# Altium PCB 32X35雷达微动一体板V0.6.PcbDoc (part 2 of 2)
Units mil, origin at the board's own origin, x right, y up, seen from the top; angles counter-clockwise.
Board outline 1258.74 x 1380 mil, 2 copper layers (Top Layer, Bottom Layer); 54 components, 40 nets, 229 pads, 39 vias.
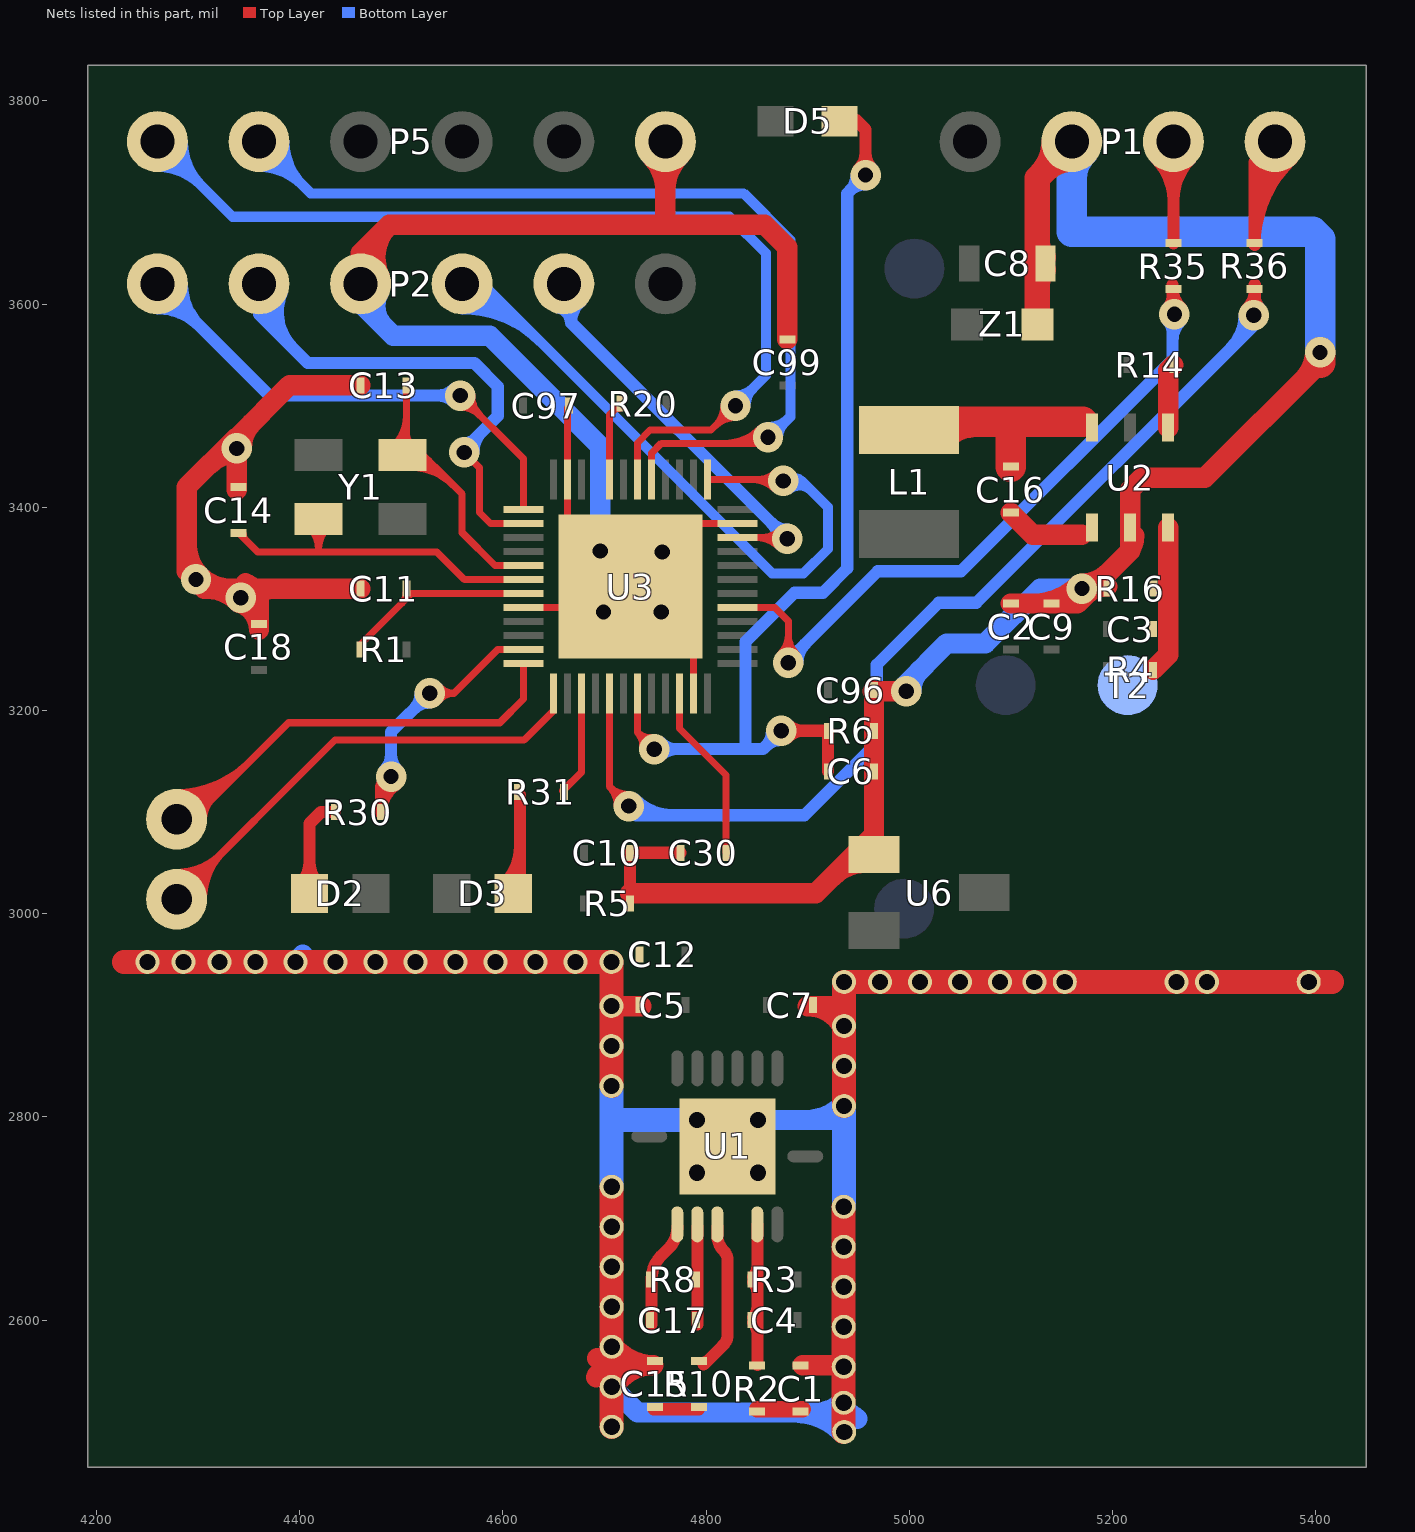
[diagram p2: the nets of this part, all layers, seen from the top]

## Via types
v1: diameter 30, hole 15, Top Layer to Bottom Layer, 36 vias
v2: diameter 26, hole 16, Top Layer to Bottom Layer, tented both sides, 2 vias
v3: diameter 40, hole 20, Top Layer to Bottom Layer, 1 vias

## Nets (pads, with @x,y where several pads share a name; then routed paths per layer and width w, separated by ;. In a path a pad name is that pad's centre, name@x,y a point inside that pad or via, vN(x,y) a via of type N, cw(c..) or ccw(c..) an arc to the next point about the centre after c; other vN are vias at no path point) (continued)
GND: C1.2 C2.2 C5.2 C6.2 C7.2 C8.2 C9.2 C10.2 C11.1 C12.2 C13.1 C14.1 C15.1 C18.2 C30.2 C96.2 C97.2 C99.2 P1.2 P2.4 P5.6 pad.1@4250.17,2952.5 pad.1@4285.61,2952.5 pad.1@4321.06,2952.5 pad.1@4356.49,2952.5 pad.1@4395.86,2952.5 pad.1@4435.23,2952.5 pad.1@4474.6,2952.5 pad.1@4513.97,2952.5 pad.1@4553.34,2952.5 pad.1@4592.71,2952.5 pad.1@4632.08,2952.5 pad.1@4671.45,2952.5 pad.1@4706.88,2830.45 pad.1@4706.88,2869.82 pad.1@4706.88,2909.19 pad.1@4706.88,2952.5 pad.1@4707.2,2495.02 pad.1@4707.2,2534.39 pad.1@4707.2,2573.76 pad.1@4707.2,2613.13 pad.1@4707.2,2652.5 pad.1@4707.2,2691.87 pad.1@4707.2,2731.24 pad.1@4791.2,2745.02 pad.1@4791.2,2797.02 pad.1@4851.17,2745.02 pad.1@4851.17,2797.02 pad.1@4935.54,2518.64 pad.1@4935.54,2554.07 pad.1@4935.54,2593.44 pad.1@4935.54,2632.81 pad.1@4935.54,2672.18 pad.1@4935.54,2711.55 pad.1@4935.86,2810.76 pad.1@4935.86,2850.13 pad.1@4935.86,2889.5 pad.1@4935.86,2932.81 pad.1@4936,2490 pad.1@4971.29,2932.8 pad.1@5010.66,2932.8 pad.1@5050.03,2932.8 pad.1@5089.4,2932.81 pad.1@5123.17,2932.81 pad.1@5153.17,2932.81 pad.1@5263.17,2932.81 pad.1@5293.17,2932.81 pad.1@5393.17,2932.81 R5.2 R6.2 R16.1 T2.1 U1.25 U2.2 U3.8 U3.23 U3.35 U3.47 U3.49 U6.1 Z1.A | length 8578.1
  Top Layer w7: U3.8@4620.2,3301.33 U3.49@4675.33,3301.33 ; U3.49@4663.52,3377.48 C97.2@4663.52,3498.24 ; U3.49@4764.01,3384.01 U3.35@4830.84,3384.01 ; U3.23@4787.54,3216.68 U3.49@4787.54,3291.46 ; 4663.52,3490.77 cw(c4670.57,3490.77) 4665.58,3495.75 ccw(c4670.57,3490.77) 4663.52,3490.77
  Top Layer w12: 4725.28,3020 C10.2@4725.28,3060 C30.2@4774.72,3060
  Top Layer w20: v1@4308.15,3320 cw(c4308.15,3277.08) v1@4338.5,3307.43 ; C14.1@4338,3417 v1@4338,3468 ; v1@4340.5,3306.21 cw(c4331.81,3279.39) 4360,3279.39 ; v1@4345.57,3307.43 cw(c4375.92,3277.08) 4375.92,3320 ; 4346.66,3325.24 cw(c4340.72,3306.89) 4360,3306.89 ; C18.2@4360,3285 4360,3320 ; C11.1@4460,3320 4306,3320 4289.05,3336.95 4289.05,3420.05 4337,3468 v1@4338,3468 ; C13.1@4460,3520 4390,3520 v1@4338,3468 ; 4710.54,2555.65 4748.17,2555.65 ; pad.1@4711.92,2908.99 C5.2@4736.51,2908.99 ; 4725.28,3020 4908,3020 4965.28,3077.28 C96.2@4965.28,3220 ; 4760,3678 P5.6@4760,3760 ; C99.2@4880,3565.28 4880,3656 4858,3678 4488,3678 ; C1.2@4895.17,2555.65 pad.1@4933.97,2555.65 ; 4933.02,2908.99 4899.82,2908.99 ; C96.2@4964,3219 v1(4997,3219) ; C2.2@5100,3305.28 5165.28,3305.28 5217.4,3357.4 5217.4,3417.4 5229,3429 5291,3429 v1@5404.33,3542.33 ; v1@4301.54,3332.54 cw(c4331.67,3362.67) 4289.05,3362.67 ccw(c4331.67,3362.67) v1@4301.54,3332.54 ; v1@4301.54,3332.54 ccw(c4331.8,3362.8) 4331.8,3320 cw(c4331.8,3362.8) v1@4301.54,3332.54 ; P2.4@4460,3620 cw(c4490.96,3633.3) 4467.13,3657.13 ccw(c4490.96,3633.3) P2.4@4460,3620 ; P2.4@4460,3620 4460,3650 4488,3678 ; 4488,3678 ccw(c4520.15,3645.85) 4478.38,3627.9 cw(c4520.15,3645.85) 4488,3678 ; 4748.16,2555.65 cw(c4748.16,2605.92) 4708.62,2574.87 ccw(c4748.16,2605.92) 4748.16,2555.65 ; 4748.16,2555.65 ccw(c4748.16,2509.55) 4708.75,2533.45 cw(c4748.16,2509.55) 4748.16,2555.65 ; 4760,3711.72 ccw(c4711.72,3711.72) 4745.86,3745.86 cw(c4711.72,3711.72) 4760,3711.72 ; 4760,3711.72 cw(c4808.28,3711.72) 4774.14,3745.86 ccw(c4808.28,3711.72) 4760,3711.72 ; 4899.82,2908.99 cw(c4899.82,2869.67) 4934.27,2888.63 ccw(c4899.82,2869.67) 4899.82,2908.99 ; 4965.28,3077.27 ccw(c4983.84,3077.27) 4970.87,3064 cw(c4983.84,3077.27) 4965.28,3077.27 ; 4965.28,3077.27 cw(c4946.72,3077.27) 4959.69,3064 ccw(c4946.72,3077.27) 4965.28,3077.27 ; 4965.28,3077.59 ccw(c4984.59,3077.59) 4970.93,3063.93 cw(c4984.59,3077.59) 4965.28,3077.59 ; 4965.28,3077.59 cw(c4945.96,3077.59) 4959.62,3063.93 ccw(c4945.96,3077.59) 4965.28,3077.59 ; 4310.69,3441.69 cw(c4338,3414.37) 4338,3453 ccw(c4338,3414.37) 4310.69,3441.69 ; v1@4343,3458 cw(c4379.21,3458) 4353.61,3483.61 ccw(c4379.21,3458) v1@4343,3458 ; 4691.64,2543.82 cw(c4712.65,2531.08) 4712.65,2555.65 ccw(c4712.65,2531.08) 4691.64,2543.82 ; 4692.89,2562.52 ccw(c4707.03,2573.63) 4707.03,2555.65 cw(c4707.03,2573.63) 4692.89,2562.52 ; 4924.13,3036.13 cw(c4958.28,3001.99) 4958.28,3050.28 ccw(c4958.28,3001.99) 4924.13,3036.13 ; 5122.38,3305.28 ccw(c5122.38,3367.62) 5166.46,3323.54 cw(c5122.38,3367.62) 5122.38,3305.28 ; v1@5170,3325 ccw(c5170,3361.21) 5195.61,3335.61 cw(c5170,3361.21) v1@5170,3325 ; v1@5173.02,3313.02 cw(c5195,3291.05) 5195,3322.13 ccw(c5195,3291.05) v1@5173.02,3313.02 ; 5213.98,3353.98 ccw(c5195.83,3372.13) 5221.5,3372.13 cw(c5195.83,3372.13) 5213.98,3353.98 ; 5388.65,3526.65 ccw(c5362.85,3552.44) 5399.33,3552.44 cw(c5362.85,3552.44) 5388.65,3526.65
  Top Layer w23.62: 4227,2952.5 pad.1@4706.88,2952.5 pad.1@4706.88,2830.45 ; pad.1@4707.2,2495.02 pad.1@4707.2,2731.24 ; pad.1@4935.54,2490 pad.1@4935.54,2711.55 ; pad.1@4935.86,2810.76 pad.1@4935.86,2932.81 5416,2932.81
  Top Layer w25: Z1.A@5126.1,3580 5126.1,3724.1 5160,3758 P1.2@5160,3760 ; 5126.1,3619.33 cw(c5146.79,3619.33) 5132.16,3633.96 ccw(c5146.79,3619.33) 5126.1,3619.33 ; 5126.1,3660.67 ccw(c5146.79,3660.67) 5132.16,3646.04 cw(c5146.79,3660.67) 5126.1,3660.67 ; 5128.71,3726.71 ccw(c5095.42,3760) 5142.5,3760 cw(c5095.42,3760) 5128.71,3726.71 ; 5133.54,3731.54 cw(c5160,3705.08) 5160,3742.5 ccw(c5160,3705.08) 5133.54,3731.54
  Top Layer w30: v1@5404.33,3542.33 v1(5404.33,3552.44)
  Bottom Layer w20: pad.1@4395.86,2952.5 pad.1@4403.17,2959.8 ; P2.4@4460,3620 4460,3601 4492,3569 4587,3569 4696,3460 v1(4696,3357) ; pad.1@4707.2,2534.39 4732.59,2508.99 4925.9,2508.99 pad.1@4935.54,2518.64 ; pad.1@4791.2,2745.02 pad.1@4791.2,2797.02 ; pad.1@4850.2,2745.02 4850.2,2797.02 4933.83,2797.02 ; v1(4997,3219) 4997,3226 5037,3266 5075,3266 5129,3320 v1(5170,3320) ; P2.4@4477.67,3610.64 ccw(c4501.83,3597.83) 4482.5,3578.5 cw(c4501.83,3597.83) P2.4@4477.67,3610.64 ; 4885.78,2508.99 cw(c4885.78,2439.78) 4934.72,2488.72 ccw(c4885.78,2439.78) 4885.78,2508.99 ; 4898.31,2797.02 ccw(c4898.31,2848.31) 4934.58,2812.04 cw(c4898.31,2848.31) 4898.31,2797.02 ; 4907.88,2508.99 ccw(c4907.88,2546.3) 4934.26,2519.92 cw(c4907.88,2546.3) 4907.88,2508.99 ; pad.1@4934.06,2508.99 cw(c4934.06,2488.06) 4948.86,2502.86 ccw(c4934.06,2488.06) pad.1@4934.06,2508.99 ; v1@5002,3219 cw(c5030.97,3219) 5010.49,3239.49 ccw(c5030.97,3219) v1@5002,3219
  Bottom Layer w23.62: pad.1@4706.88,2731.55 pad.1@4706.88,2830.45 ; 4708.85,2797.02 pad.1@4791.2,2797.02 ; pad.1@4935.86,2711.87 pad.1@4935.86,2810.76
  Bottom Layer w30: P1.2@5160,3760 5160,3671 5397,3671 5404.33,3663.67 v1(5404.33,3552.44) ; 5160,3723.79 ccw(c5123.79,3723.79) 5149.39,3749.39 cw(c5123.79,3723.79) 5160,3723.79 ; 5160,3723.79 cw(c5196.21,3723.79) 5170.61,3749.39 ccw(c5196.21,3723.79) 5160,3723.79
  other v1: 4699,3297 4756,3297 4342.04,3310.96 4298,3329 4757,3356 4338,3458
GREEN_LED: R31.1 U3.15 | length 112.3
  Top Layer w7: R31.1@4659,3121 4677.3,3139.3 U3.15@4677.3,3216.68 ; R31.1@4660,3124.37 ccw(c4660,3130.11) 4664.05,3126.05 cw(c4660,3130.11) R31.1@4660,3124.37
LIGHT: C6.1 D5.1 R6.1 U3.19 | length 1429.4
  Top Layer w7: U3.19@4732.42,3216.68 4732.42,3178.58 ; v1(4749,3162) 4732.42,3178.58 ; 4732.42,3178.58 ccw(c4745.26,3191.42) 4747.55,3173.41 cw(c4745.26,3191.42) 4732.42,3178.58 ; 4732.42,3178.58 cw(c4719.58,3165.74) 4737.59,3163.45 ccw(c4719.58,3165.74) 4732.42,3178.58
  Top Layer w12: v1(4874,3180) R6.1@4920,3180 C6.1@4920,3140 ; D5.1@4931,3781 4948,3781 4957,3772 v1(4957,3727) ; 4895.73,3180 ccw(c4895.73,3158.27) 4880.36,3173.64 cw(c4895.73,3158.27) 4895.73,3180 ; 4895.73,3180 cw(c4895.73,3201.73) 4880.36,3186.36 ccw(c4895.73,3201.73) 4895.73,3180 ; 4957,3748.73 ccw(c4978.73,3748.73) 4963.36,3733.36 cw(c4978.73,3748.73) 4957,3748.73 ; 4957,3748.73 cw(c4935.27,3748.73) 4950.64,3733.36 ccw(c4935.27,3748.73) 4957,3748.73 ; D5.1@4933.32,3782.87 cw(c4938.35,3766.67) 4950.34,3778.66 ccw(c4938.35,3766.67) D5.1@4933.32,3782.87
  Bottom Layer w12: v1(4749,3162) 4856,3162 v1(4874,3180) ; 4839,3162 4839,3268 4887,3316 4915,3316 4939,3340 4939,3709 v1(4957,3727) ; 4770.73,3162 ccw(c4770.73,3140.27) 4755.36,3155.64 cw(c4770.73,3140.27) 4770.73,3162 ; 4770.73,3162 cw(c4770.73,3183.73) 4755.36,3168.36 ccw(c4770.73,3183.73) 4770.73,3162 ; 4858.64,3164.64 ccw(c4843.27,3180) 4865,3180 cw(c4843.27,3180) 4858.64,3164.64 ; 4858.64,3164.64 cw(c4874,3149.27) 4874,3171 ccw(c4874,3149.27) 4858.64,3164.64 ; 4941.64,3711.64 ccw(c4926.27,3727) 4948,3727 cw(c4926.27,3727) 4941.64,3711.64 ; 4941.64,3711.64 cw(c4957,3696.27) 4957,3718 ccw(c4957,3696.27) 4941.64,3711.64
NetC1_1: C1.1 R2.1 | length 45
  Top Layer w16: R2.1@4850.17,2512.34 C1.1@4895.17,2512.34
NetC3_1: C3.1 R4.1 R16.2 U2.3 | length 146.1
  Top Layer w20: R4.1@5240,3240 5254.79,3254.79 U2.3@5254.79,3380
NetC4_2: C4.2 R2.2 R3.2 U1.5 | length 233.3
  Top Layer w11.8: R2.2@4850.53,2555.65 U1.5@4850.53,2694.23 ; C4.2@4846.11,2597.45 cw(c4835.45,2586.79) 4850.53,2586.79 ccw(c4835.45,2586.79) C4.2@4846.11,2597.45 ; C4.2@4846.11,2602.55 ccw(c4835.45,2613.21) 4850.53,2613.21 cw(c4835.45,2613.21) C4.2@4846.11,2602.55 ; R3.2@4846.11,2637.45 cw(c4835.45,2626.79) 4850.53,2626.79 ccw(c4835.45,2626.79) R3.2@4846.11,2637.45 ; R3.2@4846.11,2642.55 ccw(c4835.45,2653.21) 4850.53,2653.21 cw(c4835.45,2653.21) R3.2@4846.11,2642.55
NetC15_2: C15.2 R10.2 | length 45
  Top Layer w12: C15.2@4748.17,2512.34 R10.2@4793.17,2512.34
NetC16_1: C16.1 L1.1 U2.6 | length 264.3
  Top Layer w30: L1.1@5024,3484 5171,3484 ; C16.1@5100,3440 5100,3482 ; L1.1@5031.69,3469.97 cw(c5065.57,3436.09) 5065.57,3484 ccw(c5065.57,3436.09) L1.1@5031.69,3469.97
NetC16_2: C16.2 U2.1 | length 79
  Top Layer w20: C16.2@5100,3394.72 5121.72,3373 5170,3373
NetC17_1: C17.1 R8.1 U1.2 | length 96.6
  Top Layer w11.8: C17.1@4791.47,2595.65 U1.2@4791.47,2692.26
NetC17_2: C17.2 R8.2 U1.1 | length 104.4
  Top Layer w11.8: C17.2@4746.51,2595.65 4746.51,2640.65 cw(c4778.73,2640.65) 4755.95,2663.43 4763.17,2670.65 ccw(c4742.35,2691.46) 4771.79,2691.46 U1.1@4771.79,2692.26
NetC30_1: C30.1 U3.22 | length 175.8
  Top Layer w7: U3.22@4773.76,3216.68 4773.76,3182.24 4819.53,3136.47 4819.53,3060.47 C30.1@4820,3060
NetD2_K: D2.K R30.2 | length 191.8
  Top Layer w12: D2.K@4409.69,3020 4409.69,3088.69 4421,3100 R30.2@4434.72,3100 ; 4409.69,3050.7 ccw(c4439.4,3050.7) 4418.39,3029.69 cw(c4439.4,3050.7) 4409.69,3050.7 ; 4409.69,3050.7 cw(c4379.97,3050.7) 4400.98,3029.69 ccw(c4379.97,3050.7) 4409.69,3050.7
NetD3_K: D3.K R31.2 | length 182.3
  Top Layer w12: D3.K@4610.31,3020 4617,3026.69 R31.2@4617,3117 ; D3.K@4601.61,3029.69 ccw(c4564.46,3066.84) 4617,3066.84 cw(c4564.46,3066.84) D3.K@4601.61,3029.69
NetR10_1: R10.1 U1.3 | length 157.8
  Top Layer w11.8: R10.1@4797.67,2556.15 4816.92,2575.4 ccw(c4806.68,2585.65) 4821.17,2585.65 4821.17,2658.99 ccw(c4807.51,2658.99) 4817.17,2668.65 cw(c4831.67,2683.15) 4811.16,2683.15 U1.3@4811.16,2692.26 ; R10.1@4796.94,2558.04 ccw(c4796.94,2564.36) 4801.41,2559.89 cw(c4796.94,2564.36) R10.1@4796.94,2558.04
NetR14_1: R14.1 U2.4 | length 63.7
  Top Layer w20: U2.4@5254.79,3478.43 5254.79,3534.79 R14.1@5260,3540
NetR20_2: R20.2 U3.44 | length 95.8
  Top Layer w7: U3.44@4704.86,3427.32 4704.86,3491.13 R20.2@4715.72,3502 ; 4708.26,3494.53 cw(c4715.72,3487.07) 4715.72,3497.63 ccw(c4715.72,3487.07) 4708.26,3494.53
NetR35_2: R35.2 U3.29 | length 960.7
  Top Layer w7: U3.29@4830.84,3301.33 4867.67,3301.33 4881,3288 v1@4881,3249 ; 4881,3274.76 ccw(c4908.76,3274.76) 4889.13,3255.13 cw(c4908.76,3274.76) 4881,3274.76 ; 4881,3274.76 cw(c4853.24,3274.76) 4872.87,3255.13 ccw(c4853.24,3274.76) 4881,3274.76
  Top Layer w12: v1@5259,3592 5259,3619 ; v1@5254.64,3596.36 ccw(c5244.1,3606.9) 5259,3606.9 cw(c5244.1,3606.9) v1@5254.64,3596.36 ; R35.2@5259,3616.56 ccw(c5287.56,3616.56) 5267.36,3596.36 cw(c5287.56,3616.56) R35.2@5259,3616.56
  Bottom Layer w12: v1@4880,3248 4969,3337 5051,3337 5259,3545 v1@5259,3590 ; v1@4881,3256 ccw(c4881,3272.9) 4892.95,3260.95 cw(c4881,3272.9) v1@4881,3256 ; v1@4890,3247 cw(c4916.56,3247) 4897.78,3265.78 ccw(c4916.56,3247) v1@4890,3247 ; v1@5254.64,3583.64 cw(c5244.1,3573.1) 5259,3573.1 ccw(c5244.1,3573.1) v1@5254.64,3583.64 ; 5259,3563.44 cw(c5287.56,3563.44) 5267.36,3583.64 ccw(c5287.56,3563.44) 5259,3563.44
  other v1: 4881,3247 5261,3590
NetR36_1: R36.1 U3.17 | length 1365.8
  Top Layer w7: U3.17@4704.86,3216.68 4704.86,3125.14 ; v1(4724,3106) 4704.86,3125.14 ; 4704.86,3125.14 ccw(c4723.32,3143.6) 4723.79,3117.5 cw(c4723.32,3143.6) 4704.86,3125.14 ; 4704.86,3125.14 cw(c4686.4,3106.68) 4712.5,3106.21 ccw(c4686.4,3106.68) 4704.86,3125.14
  Top Layer w12: v1@5340,3590 5340,3619 ; v1@5332.64,3595.36 ccw(c5314.86,3613.14) 5340,3613.14 cw(c5314.86,3613.14) v1@5332.64,3595.36 ; 5340,3608.31 ccw(c5358.31,3608.31) 5345.36,3595.36 cw(c5358.31,3608.31) 5340,3608.31
  Bottom Layer w12: v1(4724,3106) 4724,3104 4731,3097 4897,3097 4968,3168 4968,3245 5029,3306 5066,3306 5339,3579 v1(5339,3589) ; v1@4721.88,3103.88 ccw(c4738.49,3120.49) 4738.49,3097 cw(c4738.49,3120.49) v1@4721.88,3103.88 ; v1@4730.36,3112.36 ccw(c4767.46,3149.46) 4767.46,3097 cw(c4767.46,3149.46) v1@4730.36,3112.36 ; 5316.56,3556.56 ccw(c5284.13,3589) 5330,3589 cw(c5284.13,3589) 5316.56,3556.56
NRST: C11.2 R1.1 U3.7 | length 209.7
  Top Layer w7: R1.1@4460,3260 4460,3264.94 4510.17,3315.11 U3.7@4620.2,3315.11 ; 4500.4,3305.34 ccw(c4489.68,3316.06) 4504.84,3316.06 cw(c4489.68,3316.06) 4500.4,3305.34
OUT: P1.3 R35.1 | length 282
  Top Layer w12: R35.1@5260,3660 P1.3@5260,3760 ; 5260,3702.06 ccw(c5202.06,3702.06) 5243.03,3743.03 cw(c5202.06,3702.06) 5260,3702.06 ; 5260,3702.06 cw(c5317.94,3702.06) 5276.97,3743.03 ccw(c5317.94,3702.06) 5260,3702.06
OUT1: P1.4 R36.2 | length 546.5
  Top Layer w12: R36.2@5340,3660.28 5340,3740 P1.4@5360,3760 ; P1.4@5360,3760 ccw(c5403.43,3713.77) 5340,3713.77 cw(c5403.43,3713.77) P1.4@5360,3760 ; R36.2@5340,3658.3 cw(c5455.54,3658.3) 5376.43,3742.51 ccw(c5455.54,3658.3) R36.2@5340,3658.3 ; 5340,3686.03 cw(c5429.49,3686.03) 5368.22,3751.25 ccw(c5429.49,3686.03) 5340,3686.03
PWM_O: P5.2 U3.41 | length 1409.5
  Top Layer w7: U3.41@4746.2,3427.32 4746.2,3453.2 4756,3463 v1@4854,3463 ; 4818.75,3463 ccw(c4818.75,3511.25) 4852.87,3477.13 cw(c4818.75,3511.25) 4818.75,3463 ; 4835.65,3463 ccw(c4835.65,3494.35) 4857.82,3472.18 cw(c4835.65,3494.35) 4835.65,3463
  Bottom Layer w10: P5.2@4360,3760 4411,3709 4837,3709 4883,3663 4883,3489 4863,3469 v1(4861,3469) ; 4385.61,3734.39 ccw(c4360,3708.79) 4360,3745 cw(c4360,3708.79) 4385.61,3734.39 ; 4385.61,3734.39 cw(c4411.21,3760) 4375,3760 ccw(c4411.21,3760) 4385.61,3734.39 ; 4402.68,3717.32 ccw(c4360,3674.64) 4360,3735 cw(c4360,3674.64) 4402.68,3717.32 ; 4402.68,3717.32 cw(c4445.36,3760) 4385,3760 ccw(c4445.36,3760) 4402.68,3717.32 ; v1@4861,3479 ccw(c4861,3507.97) 4881.49,3487.49 cw(c4861,3507.97) v1@4861,3479 ; v1@4871,3469 cw(c4890.31,3469) 4876.66,3482.66 ccw(c4890.31,3469) v1@4871,3469
PWM_O_1: P5.1 U3.42 | length 1421.3
  Top Layer w7: U3.42@4732.42,3427.32 4732.42,3463.42 4745,3476 4805,3476 v1(4829,3500) ; 4809.37,3480.37 ccw(c4789.74,3500) 4817.5,3500 cw(c4789.74,3500) 4809.37,3480.37 ; 4809.37,3480.37 cw(c4829,3460.74) 4829,3488.5 ccw(c4829,3460.74) 4809.37,3480.37
  Bottom Layer w10: P5.1@4260,3760 4334,3686 4823,3686 4859,3650 4859,3530 v1(4829,3500) ; 4285.61,3734.39 ccw(c4260,3708.79) 4260,3745 cw(c4260,3708.79) 4285.61,3734.39 ; 4285.61,3734.39 cw(c4311.21,3760) 4275,3760 ccw(c4311.21,3760) 4285.61,3734.39 ; 4302.68,3717.32 ccw(c4260,3674.64) 4260,3735 cw(c4260,3674.64) 4302.68,3717.32 ; 4302.68,3717.32 cw(c4345.36,3760) 4285,3760 ccw(c4345.36,3760) 4302.68,3717.32 ; 4846.07,3517.07 ccw(c4863.14,3500) 4839,3500 cw(c4863.14,3500) 4846.07,3517.07 ; 4846.07,3517.07 cw(c4829,3534.14) 4829,3510 ccw(c4829,3534.14) 4846.07,3517.07
RED_LED: R30.1 U3.11 | length 557.7
  Top Layer w7: v1(4528,3217) 4552,3217 ; U3.11@4620.2,3259.99 4594.99,3259.99 4552,3217 ; 4552,3217 ccw(c4552,3197.71) 4536.96,3209.8 cw(c4552,3197.71) 4552,3217 ; 4552,3217 cw(c4552,3236.29) 4536.96,3224.2 ccw(c4552,3236.29) 4552,3217
  Top Layer w12: R30.1@4480,3100 4480,3125 v1(4490,3135) ; R30.1@4480,3098.6 cw(c4515.36,3098.6) 4495.15,3127.62 ccw(c4515.36,3098.6) R30.1@4480,3098.6 ; 4480,3121.59 cw(c4499.34,3121.59) 4488.28,3137.46 ccw(c4499.34,3121.59) 4480,3121.59
  Bottom Layer w12: v1(4490,3135) 4490,3179 v1(4528,3217) ; 4490,3156.73 ccw(c4511.73,3156.73) 4496.36,3141.36 cw(c4511.73,3156.73) 4490,3156.73 ; 4490,3156.73 cw(c4468.27,3156.73) 4483.64,3141.36 ccw(c4468.27,3156.73) 4490,3156.73 ; 4512.64,3201.64 ccw(c4497.27,3217) 4519,3217 cw(c4497.27,3217) 4512.64,3201.64 ; 4512.64,3201.64 cw(c4528,3186.27) 4528,3208 ccw(c4528,3186.27) 4512.64,3201.64
SWCLK: P2.3 U3.37 | length 1284.6
  Top Layer w7: U3.37@4801.31,3435.32 U3.37@4801.31,3427.32 v1@4876,3427.32 ; 4845.06,3427.32 cw(c4845.06,3395.06) 4867.87,3417.87 ccw(c4845.06,3395.06) 4845.06,3427.32 ; 4851.41,3427.32 ccw(c4851.41,3450.59) 4867.87,3434.13 cw(c4851.41,3450.59) 4851.41,3427.32
  Bottom Layer w10: P2.3@4560,3620 4580,3620 4865,3335 4896,3335 4920,3359 4920,3400 4894,3426 ; v1(4876,3426) cw(c4884.94,3414.78) 4895.08,3424.92 ccw(c4884.94,3414.78) v1(4876,3426) ; v1(4876,3426) 4894,3426 ; 4894,3426 ccw(c4894,3414.8) 4884.49,3420.72 cw(c4894,3414.8) 4894,3426 ; 4894,3426 cw(c4894,3437.2) 4884.49,3431.28 ccw(c4894,3437.2) 4894,3426 ; P2.3@4560,3595 cw(c4560,3486.36) 4636.82,3563.18 ccw(c4560,3486.36) P2.3@4560,3595 ; P2.3@4560,3605 cw(c4560,3520.5) 4619.75,3580.25 ccw(c4560,3520.5) P2.3@4560,3605 ; P2.3@4560,3615 cw(c4560,3554.64) 4602.68,3597.32 ccw(c4560,3554.64) P2.3@4560,3615 ; v1@4882.23,3418.18 cw(c4891.96,3405.96) 4903,3417 ccw(c4891.96,3405.96) v1@4882.23,3418.18
SWDIO: P2.2 U3.34 | length 629.9
  Top Layer w7: U3.34@4830.84,3370.23 v1@4871.77,3370.23 ; U3.34@4849.27,3370.23 cw(c4849.27,3338.27) 4871.87,3360.87 ccw(c4849.27,3338.27) U3.34@4849.27,3370.23 ; 4855.2,3370.23 ccw(c4855.2,3393.8) 4871.87,3377.13 cw(c4855.2,3393.8) 4855.2,3370.23
  Bottom Layer w12: P2.2@4667,3625 4667,3582 v1(4880,3369) ; 4667,3581.36 ccw(c4651.42,3581.36) 4654.8,3596.57 cw(c4651.42,3581.36) 4667,3581.36 ; 4667,3581.36 cw(c4695.41,3581.36) 4676.21,3602.31 ccw(c4695.41,3581.36) 4667,3581.36 ; 4864.64,3384.36 ccw(c4880,3399.73) 4880,3378 cw(c4880,3399.73) 4864.64,3384.36 ; 4864.64,3384.36 cw(c4849.27,3369) 4871,3369 ccw(c4849.27,3369) 4864.64,3384.36
USART2_RX: pad.1@4279,3014.26 U3.13 | length 865.6
  Top Layer w7: pad.1@4278,3014.26 4434.74,3171 4621,3171 4649.74,3199.74 U3.13@4649.74,3216.68 ; pad.1@4279,3033.76 ccw(c4279,3078.42) 4310.58,3046.84 cw(c4279,3078.42) pad.1@4279,3033.76 ; pad.1@4279,3040.76 ccw(c4279,3102.32) 4322.53,3058.79 cw(c4279,3102.32) pad.1@4279,3040.76 ; pad.1@4291.5,3014.26 cw(c4324.09,3014.26) 4301.05,3037.31 ccw(c4324.09,3014.26) pad.1@4291.5,3014.26 ; pad.1@4298.5,3014.26 cw(c4347.99,3014.26) 4313,3049.26 ccw(c4347.99,3014.26) pad.1@4298.5,3014.26 ; pad.1@4305.5,3014.26 cw(c4371.89,3014.26) 4324.95,3061.21 ccw(c4371.89,3014.26) pad.1@4305.5,3014.26
USART2_TX: pad.0 U3.12 | length 939
  Top Layer w7: pad.0@4279,3093 4294,3093 4389,3188 4597,3188 4620.2,3211.2 U3.12@4620.2,3246.21 ; pad.0@4279,3098.5 ccw(c4279,3147.99) 4314,3113 cw(c4279,3147.99) pad.0@4279,3098.5 ; pad.0@4279,3105.5 ccw(c4279,3171.89) 4325.95,3124.95 cw(c4279,3171.89) pad.0@4279,3105.5 ; pad.0@4279,3112.5 ccw(c4279,3195.79) 4337.9,3136.9 cw(c4279,3195.79) pad.0@4279,3112.5 ; pad.0@4279,3119.5 ccw(c4279,3219.69) 4349.84,3148.84 cw(c4279,3219.69) pad.0@4279,3119.5 ; pad.0@4305.5,3093 cw(c4333.26,3093) 4313.63,3112.63 ccw(c4333.26,3093) pad.0@4305.5,3093
USART_RX: P2.5 U3.2 | length 841.5
  Top Layer w7: v1(4562,3454) 4577,3439 4577,3395 4587.99,3384.01 U3.2@4620.2,3384.01
  Bottom Layer w12: 4366.11,3583.89 cw(c4388.47,3606.25) P2.5@4360,3620 ; 4367.52,3582.48 cw(c4391.93,3606.89) P2.5@4360,3620 ; P2.5@4370.81,3614.78 ccw(c4404.58,3598.46) 4378.06,3571.94 ; P2.5@4371.1,3615.44 ccw(c4409.98,3599.47) 4380.26,3569.74 ; P2.5@4381.61,3609.56 ccw(c4420.68,3590.68) 4390,3560 ; P2.5@4382.2,3610.88 ccw(c4428.04,3592.05) 4393,3557 ; v1(4562,3454) 4562,3457 4595,3490 4595,3519 4572,3542 4408,3542 4360,3590 P2.5@4360,3620 ; v1@4562,3463 ccw(c4562,3477.49) 4572.24,3467.24 cw(c4562,3477.49) v1@4562,3463 ; v1@4571,3454 cw(c4599.97,3454) 4579.49,3474.49 ccw(c4599.97,3454) v1@4571,3454
USART_TX: P2.6 U3.1 | length 819
  Top Layer w7: v1(4558,3510) 4620.2,3447.8 U3.1@4620.2,3397.79 ; 4577.63,3490.37 ccw(c4558,3470.74) 4558,3498.5 cw(c4558,3470.74) 4577.63,3490.37 ; 4577.63,3490.37 cw(c4597.26,3510) 4569.5,3510 ccw(c4597.26,3510) 4577.63,3490.37
  Bottom Layer w12: P2.6@4260,3620 4370,3510 v1(4558,3510) ; 4300.97,3579.03 ccw(c4260,3538.06) 4260,3596 cw(c4260,3538.06) 4300.97,3579.03 ; 4300.97,3579.03 cw(c4341.94,3620) 4284,3620 ccw(c4341.94,3620) 4300.97,3579.03 ; 4536.27,3510 ccw(c4536.27,3531.73) 4551.64,3516.36 cw(c4536.27,3531.73) 4536.27,3510 ; 4536.27,3510 cw(c4536.27,3488.27) 4551.64,3503.64 ccw(c4536.27,3488.27) 4536.27,3510
XTALA: C13.2 U3.5 Y1.1 | length 601.9
  Top Layer w7: C13.2@4505.28,3520 4505.28,3467.72 ; U3.5@4620.2,3342.67 4592.33,3342.67 4560,3375 4560,3413 4505.28,3467.72 ; 4505.28,3467.72 ccw(c4513.03,3467.72) 4508.5,3461.43 cw(c4513.03,3467.72) 4505.28,3467.72 ; 4505.28,3467.72 cw(c4501.3,3467.72) 4501.31,3463.74 ccw(c4501.3,3467.72) 4505.28,3467.72 ; Y1.1@4492.68,3460.16 ccw(c4462.26,3490.57) 4505.28,3490.57 cw(c4462.26,3490.57) Y1.1@4492.68,3460.16 ; Y1.1@4497.63,3455.21 ccw(c4479.16,3473.67) 4505.28,3473.67 cw(c4479.16,3473.67) Y1.1@4497.63,3455.21 ; 4505.28,3471.56 ccw(c4521.4,3471.56) 4510,3460.16 cw(c4521.4,3471.56) 4505.28,3471.56 ; Y1.1@4509.21,3439.25 cw(c4509.21,3380.01) 4551.1,3421.9 ccw(c4509.21,3380.01) Y1.1@4509.21,3439.25 ; Y1.1@4509.21,3446.25 cw(c4509.21,3403.9) 4539.15,3433.85 ccw(c4509.21,3403.9) Y1.1@4509.21,3446.25 ; Y1.1@4509.21,3453.25 cw(c4509.21,3427.8) 4527.2,3445.8 ccw(c4509.21,3427.8) Y1.1@4509.21,3453.25
XTALB: C14.2 U3.6 Y1.3 | length 439.5
  Top Layer w7: C14.2@4340,3374.72 4358.72,3356 4535,3356 4562.11,3328.89 U3.6@4620.2,3328.89 ; 4418.66,3357.66 Y1.3@4418.66,3388.5 ; 4418.66,3358.93 ccw(c4389.09,3358.93) 4410,3379.84 cw(c4389.09,3358.93) 4418.66,3358.93 ; 4418.66,3358.93 cw(c4448.23,3358.93) 4427.32,3379.84 ccw(c4448.23,3358.93) 4418.66,3358.93 ; C14.2@4344.37,3374.72 ccw(c4354.93,3374.72) 4347.47,3367.26 cw(c4354.93,3374.72) C14.2@4344.37,3374.72
pads on no net: U1.10 U1.14 U1.16 U1.21 U3.3 U3.4 U3.20 U3.21 U3.25 U3.26 U3.27 U3.28 U3.30 U3.31 U3.32 U3.33 U3.38 U3.39 U3.40 U3.43 U3.45 U3.46 Y1.2 Y1.4

## Polygon pours and split planes (outlines as drawn)
GND on Top Layer "Top Layer-No Net" (solid, remove dead copper, pour order 1000): 4195.14,3840.35 5453.88,3840.35 5453.88,2475.35 5438.88,2460.35 4195.14,2460.35 4195.14,3840.35
GND on Bottom Layer "Top Layer-No Net" (solid, remove dead copper, pour order 1001): 4196.72,3829 5455.46,3829 5455.46,2449 4196.72,2449 4196.72,3822

## Keep-outs
Keep-Out Layer:
  circle w12: c4278.69,2546 r43.31
  circle w12: c5366.69,3310 r43.31
  lines w10: 4191.08,2454.07 5450.92,2454.07
  lines w20: 4191.26,2455 4191.26,3835 5450,3835 5450,2455 4191.26,2455

## Other copper
Bottom Layer:
  rectangle net GND: 4758.17,2715.65 4804.95,2821.97
  rectangle net GND: 4837.38,2731 4878.17,2822.88
  rectangle net GND: 5153.17,2920.38 5430,2943.99

## Silkscreen, mask and mechanical layers (free items; w line width, h text height)
Top Overlay:
  circle w20: c4590.6,3461.7 r11.25
  circle w20: c4534,3480 r10.73
  lines w20: 5027,3562 5027,3610
  text "ADC3" at 4621,3696 h40
  text "GND" at 4740,3696 h40
  text "ADC2" at 4514,3695 h40
  text "PW" at 4334,3694 h40
  text "ADC1" at 4413,3694 h40
  text "PW-1" at 4236,3693 h40
  text "O1" at 5291,3676 h60
  text "G" at 5096,3673 h60
  text "O" at 5190,3673 h60
  text "V" at 4992,3668 h60
  text "DIO" at 4722,3612 h40 r90
  text "TX" at 4325,3611 h40 r90
  text "RX" at 4422,3609 h40 r90
  text "CLK" at 4621,3604 h40 r90
  text "3.3V" at 4818,3600 h60
  text "GND" at 4521,3599 h40 r90
  text "TX2" at 4257,3146 h40
  text "RX2" at 4308,2969 h40
  text "Phosense" at 4271,2869 h80
  text "PH10D3235EX" at 5065,2536 h60
  text "21.1.13" at 5224,2485 h60
Bottom Overlay:
  text "GND" at 4498,3556 h40
  text "CLK" at 4590.95,3554.12 h40
  text "5-15V" at 5161,3554 h60
  text "DIO" at 4684,3553 h40
  text "TX" at 4282.25,3550.75 h40
  text "RX" at 4375.86,3551.14 h40
  text "3.3V" at 4825,3538 h60
  text "3.3V" at 5066,3248 h60
  text "GND" at 5280,3141 h60
  text "1.2V" at 4937,2999 h60
Top Solder:
  lines w23.62: 4226,2952.5 4706.88,2952.5 4706.88,2830.45 ; 4707.2,2495.02 4707.2,2731.24 ; 4935.54,2711.55 4936,2488 ; 4935.86,2810.76 4935.86,2932.81 5424.05,2932.81

## Text inside footprints (layer, text, board x,y; h text height)
D5: Top Overlay "+" at 4998,3801 h39.37 r180